# Altium PCB Flex_Bridge_SW.PcbDoc (part 1 of 2)
Units mm, origin at the board's own origin, x right, y up, seen from the top; angles counter-clockwise.
Board outline 84.91 x 39.78 mm, 2 copper layers (Top Layer, Bottom Layer); 3 components, 13 nets, 66 pads, 52 vias.
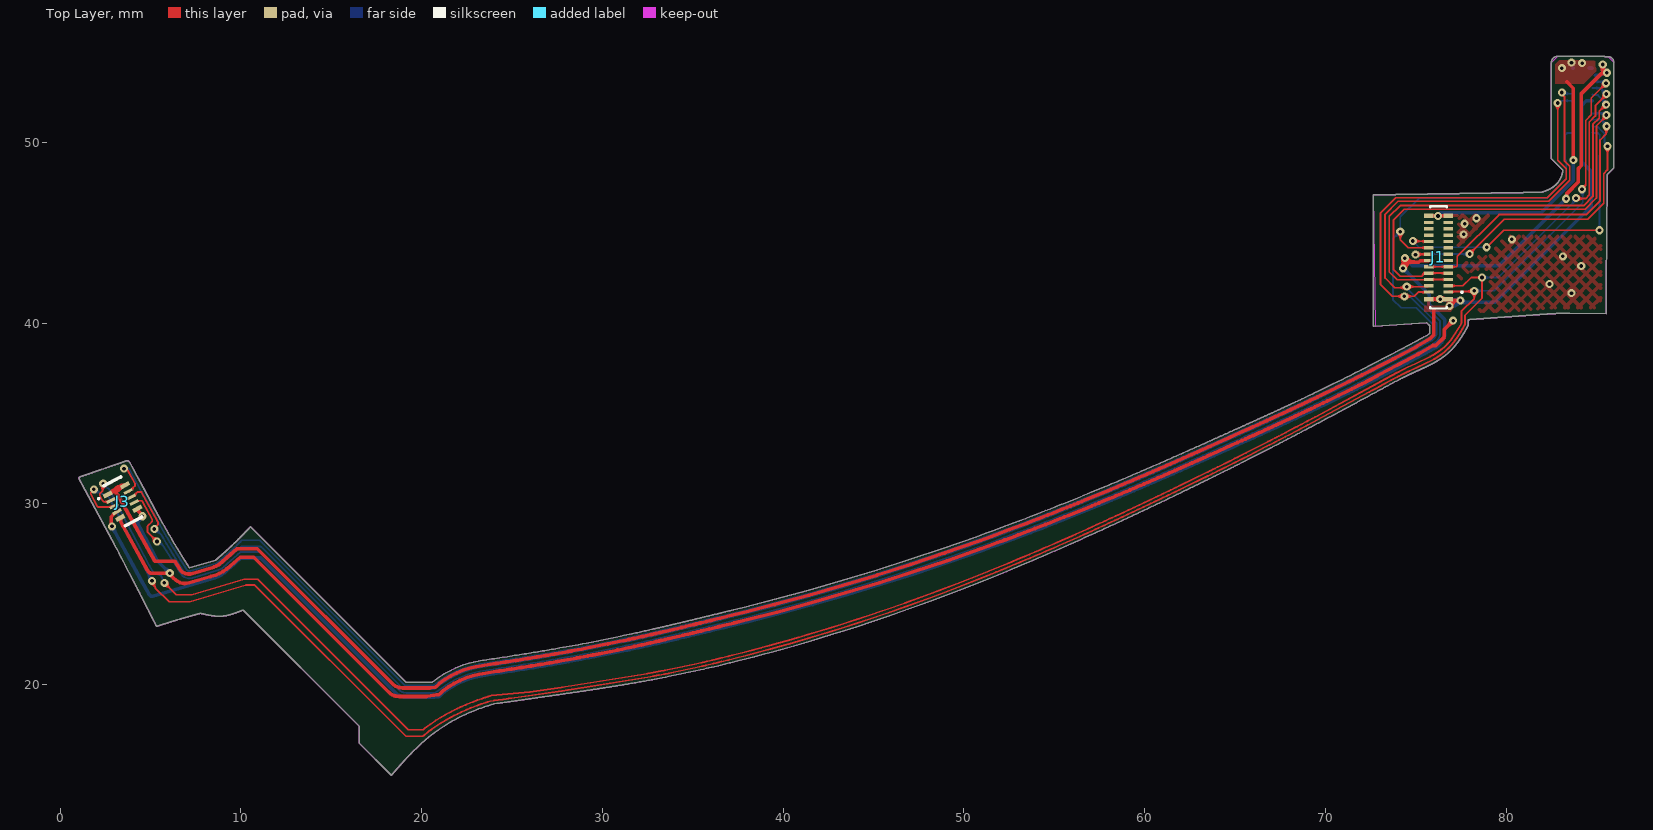
[diagram p0: Top Layer view]
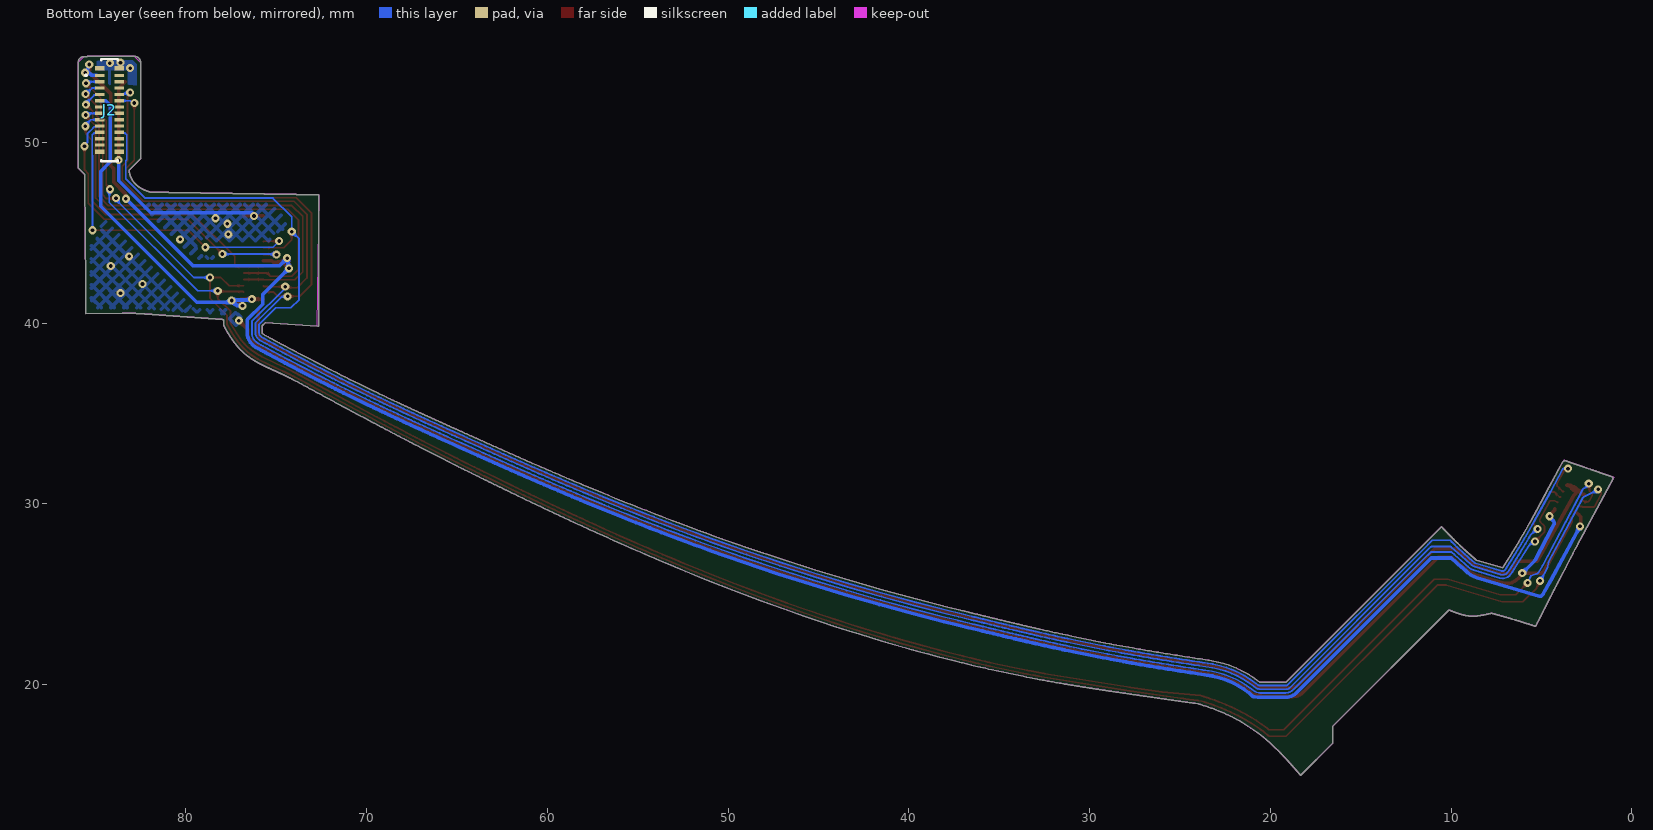
[diagram p1: Bottom Layer view, seen from below]

## Layer stack, top to bottom
Top Solder: solder mask 0.0102, Solder Resist, Dk 3.5
Top Layer: signal copper 0.0356
Dielectric 1: dielectric 0.32, FR-4, Dk 4.8
Bottom Layer: signal copper 0.0356
Bottom Solder: solder mask 0.0102, Solder Resist, Dk 3.5

## Board outline
5565 vertices, not listed, extent 1.045,14.979 85.954,54.763

## Design rules (kind name [scope] priority, off if disabled: settings)
Clearance SB [InNet('GND')] p1: gap=0.1 ignorepadtopadclearanceinfootprint=FALSE except(0.2: Arc-Arc Arc-Track Arc-Fill Arc-Poly Arc-Region Track-Track Track-Fill Track-Poly Track-Region SMDPad-Fill SMDPad-Poly SMDPad-Region THPad-Fill THPad-Poly THPad-Region Via-Fill Via-Poly Via-Region Fill-Fill Fill-Poly Fill-Region Poly-Poly Poly-Region Region-Region)
Clearance [All] p2: gap=0.1 ignorepadtopadclearanceinfootprint=FALSE
ComponentClearance [All] p1 off: gap=0.254 collisioncheckmode=3 verticalgap=0.254 showdistances=FALSE
DiffPairsRouting [All] p1: maxlimit=10 minlimit=0.125 mostfreqgap=0.15 toplayer_minwidth=0.156 toplayer_maxwidth=0.381 toplayer_prefwidth=0.381 bottomlayer_minwidth=0.156 bottomlayer_maxwidth=0.381 bottomlayer_prefwidth=0.381 maxuncoupledlength=12.7
FabricationTestPointUsage FabricationTestPointUsage_1 [All] p1: valid=0 allowmultiple=FALSE
FabricationTestpoint FabricationTestpoint_1 [All] p1: side=3 testpointundercomponent=TRUE minsize=1.016 maxsize=2.54 preferedsize=1.524 minholesize=0 maxholesize=1.016 preferedholesize=0.813 testpointgrid=0.025 allowsidetop=TRUE allowsidebottom=TRUE usegrid=TRUE gridtolerance=0
HoleSize [All] p1: absolutevalues=TRUE maxlimit=6 minlimit=0.2 maxpercent=80.000 minpercent=20.000
HoleSize FabricationTestpoint [All] p2 off: absolutevalues=TRUE maxlimit=2.54 minlimit=0.025 maxpercent=80.000 minpercent=20.000
HoleSize FabricationTestPointUsage [All] p3 off: absolutevalues=TRUE maxlimit=2.54 minlimit=0.025 maxpercent=80.000 minpercent=20.000
MinimumSolderMaskSliver [All] p1 off: minsoldermaskwidth=0.07
MinimumSolderMaskSliver SilkscreenOverComponentPads [All] p2: minsoldermaskwidth=0.1
PlaneClearance [All] p1: clearance=0.5
PlaneConnect [All] p1: planeconnectstyle=Relief reliefexpansion=0.4 reliefentries=4 reliefconductorwidth=0.15 reliefairgap=0.15
PolygonConnect [All] p1: connectstyle=Direct reliefconductorwidth=0.15 reliefentries=4 polygonreliefangle="90 Angle" airgapwidth=0.254
RoutingCorners [All] p1: cornerstyle=45-Degree minsetback=1.25 maxsetback=1.25
RoutingVias [All] p1: holewidth=0.3 width=0.6 viastyle="Through Hole" minholewidth=0.2 minwidth=0.45 maxholewidth=0.45 maxwidth=0.75
SilkToSilkClearance [All] p1 off: silktosilkclearance=0.254
SilkToSolderMaskClearance [IsPad] p1 off: minsilkscreentomaskgap=0.254 clearancetoexposedcopper=TRUE
SolderMaskExpansion Via [IsVia] p1: expansion=-0.61 istentingtop=FALSE
SolderMaskExpansion [All] p2: expansion=0.03 istentingtop=FALSE
SupplyNets "Schematic Supply Nets_1" [InNet('1V8')] p1: voltage=0.000
SupplyNets "Schematic Supply Nets" [InNet('GND')] p2: voltage=0.000
Width [All] p1: maxlimit=10 minlimit=0.1 preferedwidth=0.15
19 further rules are at their usual default settings.

## Components (designator, comment, footprint, x,y, rotation, side; value= is the part's Value field where it differs from the comment)
J1 "BM29B-24DP_2-0.35V_51" "New footprint 1" 76.251,43.637 r90 top
J2 "BM29B-24DP_2-0.35V_51" "New footprint 1" 84.22,51.777 r270 bottom
J3 "BM29B-6DP/2-0.35V(53)" BM29B-6DP_2-0.35V(53)-Footprint-1 3.454,30.124 r298 top

## Footprints (in the part's own frame and the unit in brackets; to place one, negate y for a bottom-side part, rotate by r counter-clockwise, add the part's x,y. Pads: shape width x height; smd on the part's side, far side on the other; paste and mask are expansions set on the pad)
BM29B-6DP_2-0.35V(53)-Footprint-1 [mm]
  rect 0.25x0.53 smd: 1(-0.735,-0.54) 2(-0.735,0.54) 9(0.735,-0.54) 10(0.735,0.54)
  rect 0.18x0.53 smd: 3(-0.35,-0.54) 4(-0.35,0.54) 5(0,-0.54) 6(0,0.54) 7(0.35,-0.54) 8(0.35,0.54)
  silkscreen extent -1.25,-1.14 1.26,0.54, body extent -1.25,-0.79 1.25,0.79, height 0.51
"New footprint 1" [mm]
  rect 0.18x0.53 smd paste-1 mask+0.05: 1(-1.925,-0.54) 2(-1.925,0.54) 3(-1.575,-0.54) 4(-1.575,0.54) 5(-1.225,-0.54) 6(-1.225,0.54) 7(-0.875,-0.54) 8(-0.875,0.54) 9(-0.525,-0.54) 10(-0.525,0.54) 11(-0.175,-0.54) 12(-0.175,0.54) 13(0.175,-0.54) 14(0.175,0.54) 15(0.525,-0.54) 16(0.525,0.54) 17(0.875,-0.54) 18(0.875,0.54) 19(1.225,-0.54) 20(1.225,0.54) 21(1.575,-0.54) 22(1.575,0.54) 23(1.925,-0.54) 24(1.925,0.54)
  rect 0.25x0.53 smd paste-1 mask+0.05: P1_1(-2.31,-0.54) P1_2(-2.31,0.54) P2_1(2.31,-0.54) P2_2(2.31,0.54)
  silkscreen extent -2.83,-1.36 2.83,0.46, body extent -2.83,-0.69 2.83,0.71, height 0.4

## Part data
J1 J2: library part CMP-00140-3, "Ultra-small, power/signal contact design for Board-to-Board/FPC-to-Board providing 3A max current"
J3: library part CMP-002-00078-6, "Ultra-Small, Power & Signal Hybrid, Board to Board / FPC to Board with 3A Max."

## Via types
v1: diameter 0.45, hole 0.2, Top Layer to Bottom Layer, 52 vias

## Nets (pads, with @x,y where several pads share a name; then routed paths per layer and width w, separated by ;. In a path a pad name is that pad's centre, name@x,y a point inside that pad or via, vN(x,y) a via of type N, cw(c..) or ccw(c..) an arc to the next point about the centre after c; other vN are vias at no path point)
1V8: J1.P1_1 J1.P1_2 J2.9 J3.1 J3.2 | length 105.9
  Top Layer w0.2: J3.1@2.633,30.52 2.712,30.52 2.937,30.744 cw(c3.713,29.968) J3.2@3.545,31.053 ; 2.937,30.665 3.016,30.665 ; 3.021,30.66 3.073,30.608 ; J3.2@3.586,31.027 3.431,30.966 3.073,30.608 ; 8.489,26.503 7.272,26.139 cw(c7.107,26.694) 6.641,26.35 cw(c7.107,26.694) 6.639,26.353 6.619,26.384 6.342,26.828 5.231,26.828 3.274,30.363 3.26,30.387 3.222,30.46 3.12,30.561 3.073,30.608 ; 8.49,26.503 ccw(c8.156,27.617) 9.039,26.86 9.099,26.913 ccw(c8.803,27.252) 9.101,26.914 9.169,26.974 ; 9.169,26.974 ccw(c8.872,27.312) 9.17,26.975 9.202,27.003 ccw(c8.658,27.624) 9.203,27.004 9.788,27.519 10.905,27.519 18.369,20.054 ccw(c18.955,20.635) 18.648,19.869 ccw(c18.955,20.635) 18.955,19.81 20.374,19.81 ccw(c20.377,20.635) 20.5,19.819 20.752,19.859 20.795,19.876 20.911,19.991 20.975,20.056 20.981,20.061 cw(c24.021,16.121) 22.996,20.991 cw(c23.037,20.795) 23.006,20.992 23.81,21.12 23.955,21.142 24.097,21.163 ; 24.098,21.163 24.239,21.185 24.38,21.206 ; 24.382,21.207 24.521,21.228 24.659,21.249 ccw(c24.622,21.496) 24.661,21.249 24.797,21.27 24.935,21.292 25.07,21.313 25.204,21.334 25.339,21.356 25.472,21.377 25.603,21.398 ; 25.604,21.398 25.735,21.419 25.865,21.44 25.993,21.461 26.122,21.482 ; 26.123,21.483 26.249,21.503 ; 26.249,21.504 ccw(c26.209,21.75) 26.25,21.504 26.377,21.525 26.501,21.546 ; 26.503,21.546 26.626,21.567 26.75,21.588 ; 26.751,21.588 26.872,21.608 ccw(c26.831,21.855) 26.874,21.609 26.995,21.629 27.116,21.65 ; 27.116,21.65 ccw(c27.074,21.897) 27.118,21.651 27.236,21.671 ccw(c27.195,21.918) 27.238,21.671 27.357,21.692 ccw(c27.315,21.939) 27.358,21.692 27.478,21.713 27.594,21.734 ; 27.595,21.734 27.77,21.765 27.944,21.797 28.117,21.828 ccw(c28.074,22.074) 28.119,21.828 28.289,21.859 ; 28.289,21.859 ccw(c28.245,22.105) 28.29,21.86 28.461,21.891 28.628,21.922 28.85,21.964 29.07,22.006 ccw(c29.025,22.252) 29.072,22.006 29.342,22.058 ccw(c29.22,22.697) 29.347,22.059 30.294,22.247 ccw(c30.133,23.056) 30.3,22.248 30.709,22.333 ccw(c30.618,22.773) 30.71,22.333 30.965,22.386 31.167,22.429 ; 31.169,22.429 31.319,22.462 31.47,22.494 ; 31.471,22.494 31.621,22.527 31.72,22.548 31.82,22.57 ; 31.821,22.57 31.919,22.592 32.019,22.614 32.118,22.636 32.216,22.657 32.316,22.68 32.413,22.701 ccw(c32.315,23.141) 32.416,22.702 32.512,22.724 ; 32.513,22.724 32.61,22.746 ; 32.611,22.746 32.713,22.769 32.807,22.79 ; 32.808,22.791 32.856,22.802 ccw(c32.756,23.24) 32.858,22.802 32.905,22.813 ccw(c32.85,23.057) 32.907,22.813 32.954,22.824 ; 32.955,22.824 33.003,22.835 ccw(c32.903,23.274) 33.005,22.836 33.107,22.859 33.198,22.88 33.293,22.902 33.347,22.914 33.395,22.926 ; 33.396,22.926 33.493,22.948 ; 33.494,22.949 33.542,22.96 33.641,22.983 33.738,23.006 ; 33.739,23.006 33.878,23.038 33.983,23.063 ccw(c33.881,23.502) 33.985,23.064 34.131,23.098 34.328,23.145 ccw(c34.271,23.388) 34.329,23.145 34.378,23.157 ccw(c34.321,23.4) 34.379,23.157 34.428,23.169 ; 34.429,23.169 34.576,23.204 ; 34.577,23.204 34.627,23.216 34.873,23.275 ccw(c34.828,23.47) 34.874,23.276 35.074,23.324 ; 35.075,23.324 35.124,23.336 ; 35.125,23.336 35.175,23.348 35.325,23.384 35.424,23.408 ccw(c35.368,23.652) 35.427,23.409 35.477,23.421 35.731,23.482 ; 35.732,23.483 35.783,23.495 ; 35.784,23.495 35.988,23.545 36.246,23.608 ccw(c36.14,24.045) 36.247,23.608 36.351,23.633 36.508,23.672 ccw(c36.401,24.109) 36.509,23.672 36.613,23.697 37.146,23.827 ccw(c36.992,24.459) 37.149,23.828 37.85,24.001 ccw(c37.653,24.802) 37.857,24.003 39.531,24.433 ccw(c39.371,25.063) 39.536,24.434 ccw(c4.873,155.811) 50.793,27.933 51.27,28.105 51.695,28.26 ; 51.696,28.261 52.12,28.417 ; 52.121,28.417 52.49,28.555 ; 52.491,28.555 52.86,28.694 ; 52.861,28.694 53.176,28.814 53.493,28.935 53.808,29.055 ; 53.809,29.056 54.122,29.177 ; 54.123,29.177 54.384,29.278 54.644,29.38 ccw(c54.408,29.986) 54.647,29.381 54.906,29.483 ccw(c54.815,29.716) 54.908,29.484 55.166,29.586 ccw(c55.002,30.005) 55.169,29.587 55.43,29.691 55.688,29.794 ; 55.689,29.794 55.897,29.878 56.104,29.961 56.312,30.045 ccw(c56.218,30.277) 56.314,30.046 56.52,30.13 ccw(c56.35,30.547) 56.521,30.13 56.727,30.214 ccw(c56.634,30.446) 56.728,30.215 56.937,30.3 57.142,30.385 57.349,30.47 57.557,30.556 57.765,30.642 ; 57.766,30.642 57.971,30.728 ccw(c57.876,30.959) 57.973,30.729 58.127,30.793 ccw(c57.877,31.393) 58.129,30.794 ; 58.129,30.794 58.283,30.859 58.436,30.923 ccw(c58.187,31.523) 58.44,30.925 58.595,30.99 58.748,31.054 ccw(c58.652,31.285) 58.75,31.055 58.905,31.121 59.062,31.187 59.215,31.253 59.369,31.318 ccw(c59.273,31.549) 59.371,31.319 59.526,31.385 59.68,31.452 ccw(c59.504,31.866) 59.683,31.453 59.836,31.518 ccw(c59.739,31.749) 59.838,31.519 59.991,31.585 ccw(c59.736,32.183) 59.993,31.586 60.147,31.652 ccw(c59.971,32.066) 60.149,31.653 60.304,31.72 ; 60.304,31.72 60.458,31.787 60.615,31.855 60.769,31.922 ccw(c60.511,32.519) 60.772,31.923 60.926,31.991 ccw(c60.747,32.403) 60.928,31.991 61.081,32.058 61.237,32.127 ccw(c61.139,32.356) 61.239,32.128 61.394,32.195 ; 61.394,32.195 ccw(c61.295,32.425) 61.396,32.196 61.55,32.264 61.654,32.31 ; 61.655,32.31 61.758,32.356 61.862,32.402 ccw(c61.762,32.631) 61.863,32.402 61.967,32.448 ; 61.967,32.448 62.07,32.493 ccw(c61.889,32.905) 62.073,32.495 62.176,32.54 62.28,32.586 ; 62.28,32.587 62.384,32.633 ccw(c62.201,33.044) 62.386,32.633 62.488,32.679 ; 62.489,32.679 62.593,32.726 ; 62.594,32.726 62.696,32.772 ccw(c62.596,33.001) 62.698,32.772 62.802,32.819 ; 62.802,32.819 62.905,32.865 ; 62.907,32.866 63.01,32.912 ccw(c62.674,33.665) 63.012,32.913 63.116,32.959 ccw(c62.933,33.37) 63.117,32.96 63.22,33.006 ccw(c63.119,33.234) 63.221,33.006 63.324,33.053 ccw(c62.988,33.806) 63.327,33.054 63.432,33.101 63.534,33.147 ccw(c63.433,33.376) 63.536,33.148 63.639,33.194 ccw(c63.538,33.422) 63.64,33.195 64.664,33.656 ; 64.665,33.656 65.01,33.812 ; 65.011,33.812 65.256,33.922 65.448,34.009 ccw(c65.263,34.42) 65.45,34.01 ; 65.45,34.01 65.641,34.096 ; 65.642,34.097 65.83,34.182 ccw(c65.728,34.41) 65.831,34.183 65.879,34.204 ; 65.879,34.204 65.926,34.225 ; 65.927,34.226 65.975,34.248 66.196,34.348 66.276,34.384 66.404,34.442 66.564,34.515 66.674,34.565 ccw(c66.488,34.975) 66.676,34.566 66.721,34.587 ; 66.721,34.587 66.766,34.607 ccw(c66.497,35.199) 66.769,34.608 66.951,34.691 67.042,34.733 ccw(c66.856,35.143) 67.045,34.735 67.148,34.782 67.272,34.839 ; 67.273,34.839 67.364,34.881 ccw(c67.26,35.108) 67.366,34.882 67.446,34.919 67.592,34.986 67.71,35.041 67.776,35.071 67.924,35.14 68.027,35.187 68.093,35.218 ccw(c67.99,35.446) 68.095,35.219 68.14,35.24 ccw(c67.95,35.648) 68.141,35.241 68.185,35.261 ; 68.186,35.262 68.23,35.282 ; 68.231,35.283 68.324,35.326 68.411,35.367 ccw(c68.308,35.595) 68.414,35.368 68.503,35.41 ccw(c68.313,35.818) 68.505,35.411 68.594,35.453 ccw(c68.49,35.68) 68.596,35.454 68.686,35.496 68.777,35.539 ccw(c68.586,35.946) 68.779,35.54 68.869,35.582 68.961,35.626 69.053,35.669 69.142,35.712 ccw(c68.791,36.458) 69.146,35.714 69.283,35.779 69.419,35.844 ccw(c69.314,36.07) 69.422,35.845 69.559,35.911 ccw(c69.279,36.497) 69.561,35.912 69.745,36 ccw(c69.55,36.406) 69.747,36.001 69.978,36.113 ccw(c69.696,36.698) 69.981,36.114 70.593,36.412 ccw(c70.232,37.154) 70.598,36.415 71.078,36.652 ; 71.079,36.652 71.323,36.773 ccw(c71.035,37.356) 71.326,36.775 71.521,36.873 ccw(c71.154,37.611) 71.524,36.874 71.726,36.976 71.874,37.05 ; 71.875,37.051 72.027,37.128 72.181,37.206 ; 72.182,37.206 72.342,37.287 72.441,37.338 ; 72.442,37.338 72.547,37.392 72.65,37.445 ccw(c72.538,37.668) 72.652,37.446 72.759,37.501 72.863,37.554 ccw(c72.658,37.955) 72.864,37.555 72.97,37.61 ccw(c72.858,37.833) 72.972,37.611 73.079,37.666 ; 73.08,37.666 73.188,37.722 ccw(c72.981,38.122) 73.189,37.723 73.298,37.78 73.407,37.836 ; 73.408,37.836 73.519,37.894 73.629,37.952 73.74,38.01 ccw(c73.533,38.409) 73.743,38.011 73.854,38.069 74.943,38.641 74.946,38.642 ccw(c72.145,43.639) 75.048,38.702 75.799,39.142 75.997,39.34 75.997,40.714 ; J1.P1_2@75.712,41.327 v1(76.345,41.326) ; v1@76.346,41.327 76.79,41.327 76.931,41.327 77.008,41.25 77.167,41.25 ; v1(76.866,40.948) 77.167,41.25 ; v1(77.47,41.25) 77.167,41.25
  Bottom Layer w0.2: v1(76.345,41.326) 76.393,41.278 v1@77.442,41.278 ; v1(76.866,40.948) 76.888,40.97 77.191,40.97 v1@77.42,41.2 ; v1(77.47,41.25) v1@77.518,41.202 ; v1@77.573,41.144 79.396,41.144 84.709,46.457 84.709,48.387 84.176,48.92 84.176,52.041 84.437,52.302 J2.9@84.76,52.302
3V3: J1.12 J2.1 J3.7 | length 113.4
  Top Layer w0.2: v1@2.819,28.804 2.819,29.239 2.83,29.291 2.91,29.37 ; 2.91,29.371 J3.7@3.141,29.561 ; v1(74.295,43.028) 74.312,43.045 v1@74.312,43.112 ; v1@74.295,43.095 v1@74.312,43.112 ; v1@74.379,43.111 74.632,43.365 ; J1.12@75.701,43.452 75.244,43.452 75.157,43.365 74.691,43.365 ; v1(83.314,46.876) 83.362,46.924 83.362,47.173 83.992,47.803 83.997,47.803 83.997,48.556 84.149,48.709 84.149,49.044 84.144,49.049 84.144,51.303 84.144,52.672 85.275,53.803 85.527,53.803 v1(85.573,53.848) ; 85.344,53.871 v1(85.344,54.305) ; v1@74.312,43.112 74.345,43.145 74.345,43.346 ; v1@74.312,43.112 74.312,43.447 v1@74.345,43.48 ; 74.345,43.346 v1@74.345,43.48 ; 74.345,43.346 74.363,43.365 74.632,43.365 ; v1@74.345,43.48 74.345,43.547 v1(74.393,43.595) 74.461,43.595 74.691,43.365 ; 74.632,43.365 74.691,43.365
  Bottom Layer w0.2: v1(2.87,28.753) 4.484,25.749 4.912,25.002 5.029,24.885 5.132,24.882 8.575,25.912 ccw(c8.173,27.253) 9.236,26.342 9.296,26.395 ccw(c9,26.734) 9.298,26.396 9.365,26.455 ; 9.366,26.455 ccw(c9.069,26.794) 9.367,26.457 9.399,26.484 ccw(c8.855,27.105) 9.4,26.486 9.985,27 11.101,27 18.566,19.536 ccw(c19.152,20.117) 18.845,19.351 ccw(c19.152,20.117) 19.152,19.292 20.571,19.292 ccw(c20.574,20.117) 20.697,19.301 20.949,19.34 20.992,19.358 21.107,19.473 21.172,19.537 21.178,19.543 cw(c24.218,15.603) 23.193,20.472 cw(c23.234,20.277) 23.203,20.474 24.006,20.602 24.152,20.624 24.294,20.645 ; 24.295,20.645 24.436,20.667 24.577,20.688 ; 24.579,20.688 24.718,20.71 24.856,20.731 ccw(c24.819,20.978) 24.858,20.731 24.994,20.752 25.132,20.774 25.266,20.795 25.401,20.816 25.536,20.837 25.669,20.859 25.8,20.88 ; 25.801,20.88 25.931,20.901 26.062,20.922 26.19,20.943 26.318,20.964 ; 26.32,20.964 26.446,20.985 ; 26.446,20.985 ccw(c26.406,21.232) 26.447,20.985 26.574,21.006 26.698,21.027 ; 26.699,21.027 26.823,21.048 26.947,21.069 ; 26.948,21.069 27.069,21.09 ccw(c27.028,21.337) 27.07,21.09 27.192,21.111 27.313,21.132 ccw(c27.27,21.378) 27.315,21.132 27.433,21.153 ccw(c27.392,21.399) 27.435,21.153 27.554,21.174 ccw(c27.512,21.42) 27.555,21.174 27.675,21.195 27.791,21.216 ; 27.792,21.216 27.967,21.247 28.141,21.278 28.314,21.31 ccw(c28.271,21.556) 28.316,21.31 28.485,21.341 ; 28.486,21.341 ccw(c28.442,21.587) 28.487,21.341 28.658,21.373 28.825,21.404 29.047,21.446 29.267,21.487 ccw(c29.222,21.733) 29.269,21.488 29.539,21.54 ccw(c29.417,22.178) 29.544,21.541 30.491,21.729 ccw(c30.33,22.538) 30.497,21.73 30.906,21.814 ccw(c30.815,22.255) 30.907,21.815 31.161,21.868 31.364,21.911 ; 31.365,21.911 31.516,21.943 31.667,21.976 ; 31.668,21.976 31.818,22.008 31.917,22.03 32.017,22.052 ; 32.017,22.052 32.116,22.073 32.215,22.095 32.315,22.117 32.413,22.139 32.513,22.161 32.61,22.183 ccw(c32.512,22.622) 32.613,22.184 32.709,22.205 ; 32.71,22.205 32.807,22.227 ; 32.808,22.228 32.91,22.251 33.004,22.272 ; 33.004,22.272 33.053,22.283 ccw(c32.953,22.722) 33.054,22.284 33.102,22.294 ccw(c33.047,22.538) 33.103,22.295 33.151,22.306 ; 33.152,22.306 33.2,22.317 ccw(c33.1,22.756) 33.202,22.317 33.304,22.341 33.395,22.362 33.49,22.384 33.544,22.396 33.592,22.407 ; 33.593,22.408 33.69,22.43 ; 33.691,22.43 33.739,22.442 33.838,22.465 33.935,22.487 ; 33.936,22.488 34.075,22.52 34.18,22.545 ccw(c34.078,22.983) 34.182,22.545 34.328,22.58 34.525,22.627 ccw(c34.468,22.87) 34.526,22.627 34.574,22.638 ccw(c34.518,22.882) 34.576,22.639 34.625,22.65 ; 34.625,22.651 34.773,22.686 ; 34.774,22.686 34.823,22.698 35.07,22.757 ccw(c35.024,22.952) 35.071,22.757 35.271,22.805 ; 35.271,22.805 35.321,22.817 35.372,22.83 35.522,22.866 35.621,22.89 ; 35.621,22.89 ccw(c35.564,23.133) 35.624,22.89 35.674,22.903 35.928,22.964 ; 35.929,22.964 35.979,22.977 ; 35.98,22.977 36.185,23.027 36.442,23.089 ccw(c36.337,23.527) 36.444,23.09 36.548,23.115 36.705,23.153 ccw(c36.598,23.59) 36.706,23.154 36.81,23.179 37.343,23.309 ccw(c37.189,23.941) 37.346,23.31 38.047,23.483 ccw(c37.85,24.284) 38.054,23.484 39.728,23.914 ccw(c39.568,24.544) 39.733,23.916 ccw(c5.07,155.292) 50.99,27.414 51.467,27.587 51.892,27.742 52.316,27.899 ; 52.318,27.899 52.687,28.037 ; 52.688,28.037 53.057,28.176 ; 53.058,28.176 53.373,28.295 53.69,28.416 54.005,28.537 ; 54.006,28.537 54.319,28.659 ; 54.32,28.659 54.581,28.76 54.841,28.862 ccw(c54.605,29.468) 54.844,28.863 55.103,28.965 ccw(c55.011,29.198) 55.104,28.966 55.363,29.068 ccw(c55.199,29.487) 55.365,29.069 55.627,29.173 55.885,29.276 ; 55.886,29.276 56.094,29.36 56.301,29.443 56.509,29.527 ccw(c56.415,29.759) 56.51,29.528 56.716,29.611 ccw(c56.547,30.028) 56.718,29.612 56.924,29.696 ccw(c56.831,29.928) 56.925,29.697 57.133,29.782 57.339,29.866 57.546,29.952 57.754,30.038 57.961,30.124 ; 57.962,30.124 58.168,30.21 ccw(c58.073,30.441) 58.17,30.21 58.324,30.275 ccw(c58.074,30.875) 58.325,30.276 ; 58.326,30.276 58.48,30.34 58.633,30.405 ccw(c58.383,31.005) 58.637,30.406 58.792,30.472 58.945,30.536 ccw(c58.849,30.767) 58.946,30.537 59.102,30.603 59.259,30.669 59.412,30.734 59.566,30.8 ccw(c59.47,31.031) 59.568,30.801 59.722,30.867 59.877,30.933 ccw(c59.701,31.347) 59.88,30.934 60.033,31 ccw(c59.936,31.23) 60.034,31.001 60.188,31.067 ccw(c59.933,31.665) 60.19,31.068 60.344,31.134 ccw(c60.167,31.548) 60.346,31.135 60.5,31.202 ; 60.501,31.202 60.655,31.269 60.812,31.337 60.966,31.404 ccw(c60.708,32.001) 60.969,31.405 61.123,31.472 ccw(c60.944,31.885) 61.125,31.473 61.278,31.54 61.434,31.608 ccw(c61.336,31.838) 61.436,31.609 61.59,31.677 ; 61.591,31.677 ccw(c61.492,31.907) 61.592,31.678 61.747,31.746 61.851,31.791 ; 61.852,31.792 61.955,31.837 62.059,31.883 ccw(c61.959,32.112) 62.06,31.884 62.164,31.929 62.267,31.975 ccw(c62.086,32.387) 62.269,31.976 62.373,32.022 62.476,32.068 ; 62.477,32.068 62.581,32.114 ccw(c62.398,32.526) 62.582,32.115 62.685,32.161 ; 62.686,32.161 62.79,32.207 62.893,32.253 ccw(c62.793,32.482) 62.894,32.254 62.999,32.3 ; 62.999,32.301 63.102,32.347 ; 63.104,32.347 63.207,32.394 ccw(c62.871,33.147) 63.209,32.394 63.313,32.441 ccw(c63.129,32.852) 63.314,32.441 63.417,32.487 ccw(c63.316,32.716) 63.418,32.488 63.521,32.534 ccw(c63.184,33.287) 63.523,32.535 63.629,32.583 63.731,32.628 ccw(c63.63,32.857) 63.733,32.629 63.835,32.676 ccw(c63.734,32.904) 63.837,32.676 64.86,33.137 ; 64.861,33.138 65.207,33.293 ; 65.208,33.294 65.453,33.404 65.645,33.491 ccw(c65.46,33.901) 65.647,33.492 ; 65.647,33.492 65.838,33.578 ; 65.839,33.578 66.027,33.663 ccw(c65.925,33.892) 66.028,33.664 66.076,33.686 ; 66.076,33.686 66.123,33.707 ; 66.124,33.707 66.172,33.729 66.393,33.83 66.473,33.866 66.601,33.924 66.761,33.997 66.871,34.047 ccw(c66.685,34.457) 66.873,34.048 66.918,34.068 ; 66.918,34.068 66.963,34.089 ccw(c66.694,34.681) 66.966,34.09 67.148,34.173 67.239,34.215 ccw(c67.053,34.625) 67.242,34.216 67.345,34.264 67.469,34.321 ; 67.47,34.321 67.561,34.363 ccw(c67.457,34.59) 67.563,34.364 67.643,34.401 67.789,34.468 67.907,34.522 67.973,34.553 68.121,34.621 68.223,34.669 68.29,34.7 ccw(c68.186,34.928) 68.292,34.701 68.337,34.722 ccw(c68.147,35.13) 68.338,34.722 68.382,34.743 ; 68.383,34.743 68.427,34.764 ; 68.428,34.764 68.521,34.808 68.608,34.849 ccw(c68.505,35.076) 68.611,34.85 68.7,34.892 ccw(c68.51,35.3) 68.702,34.893 68.791,34.934 ccw(c68.687,35.162) 68.793,34.935 68.883,34.978 68.974,35.021 ccw(c68.783,35.428) 68.976,35.022 69.066,35.064 ; 69.067,35.064 69.158,35.108 69.25,35.151 69.339,35.193 ccw(c68.987,35.94) 69.343,35.195 69.48,35.26 69.616,35.326 ccw(c69.511,35.552) 69.619,35.327 69.756,35.392 ccw(c69.476,35.979) 69.758,35.393 69.942,35.482 ccw(c69.747,35.888) 69.944,35.483 70.175,35.594 ccw(c69.893,36.18) 70.178,35.596 70.789,35.894 ccw(c70.429,36.636) 70.795,35.896 71.275,36.133 ; 71.276,36.134 71.52,36.255 ccw(c71.232,36.838) 71.523,36.257 71.718,36.354 ccw(c71.351,37.093) 71.721,36.356 71.923,36.457 72.071,36.532 ; 72.072,36.532 72.224,36.609 72.378,36.688 ; 72.379,36.688 72.539,36.769 72.638,36.82 ; 72.639,36.82 72.744,36.874 72.847,36.927 ccw(c72.735,37.15) 72.849,36.928 72.956,36.983 73.059,37.036 ccw(c72.854,37.437) 73.061,37.037 73.167,37.091 ccw(c73.054,37.315) 73.169,37.093 73.276,37.148 73.385,37.204 ccw(c73.178,37.604) 73.386,37.205 73.495,37.261 73.603,37.318 ; 73.604,37.318 73.716,37.376 73.826,37.434 73.937,37.492 ccw(c73.73,37.891) 73.939,37.493 74.051,37.551 74.164,37.61 74.275,37.669 74.394,37.731 ccw(c74.091,38.307) 74.396,37.733 74.511,37.794 74.626,37.854 74.745,37.918 74.863,37.98 ccw(c74.747,38.202) 74.865,37.981 74.982,38.043 ccw(c74.866,38.265) 74.983,38.044 75.103,38.108 ccw(c74.987,38.329) 75.104,38.108 75.224,38.172 ; 75.225,38.172 75.345,38.237 ccw(c75.229,38.458) 75.347,38.238 75.468,38.303 ccw(c75.257,38.7) 75.47,38.304 75.593,38.369 75.718,38.437 75.847,38.506 75.97,38.573 76.098,38.641 ccw(c75.706,39.367) 76.185,38.696 ccw(c75.706,39.367) 76.291,38.786 76.352,38.846 ccw(c75.77,39.431) 76.562,39.202 76.585,39.279 ccw(c76.345,39.349) 76.595,39.349 76.595,40.193 75.743,41.045 75.743,41.58 v1(74.295,43.028) 74.343,43.075 74.343,43.477 74.393,43.527 v1(74.393,43.595) 74.808,43.18 79.618,43.18 v1(83.314,46.876) ; J2.1@84.925,53.702 85.192,53.702 85.419,53.928 v1@85.419,54.002 ; v1(85.344,54.305) 85.392,54.257 85.392,54.09 85.419,54.063 v1@85.419,54.002 ; v1@85.545,53.848 v1(85.573,53.848) v1@85.419,54.002
GND: J1.P2_1 J1.P2_2 J2.P1_1 J2.P1_2 J3.9 J3.10 | length 103.7
  Top Layer w0.2: J3.9@3.353,29.21 3.353,29.032 3.36,29.011 3.476,28.774 4.824,26.339 ccw(c5.514,26.722) 4.889,26.241 ccw(c5.046,26.364) 4.958,26.185 4.999,26.164 5.046,26.164 v1(6.065,26.164) ; J3.10@4.276,29.729 4.276,29.65 4.547,29.379 v1(4.547,29.312) ; v1@6.076,26.149 6.183,25.977 6.199,25.961 6.258,25.903 6.393,25.785 ccw(c6.915,26.386) 7.145,25.624 8.329,25.978 8.369,25.988 ccw(c7.805,28.233) 9.382,26.539 9.401,26.557 9.959,27.047 10.713,27.047 18.177,19.583 ccw(c18.763,20.164) 18.456,19.398 ccw(c18.763,20.164) 18.763,19.339 20.182,19.339 ccw(c20.185,20.164) 20.308,19.348 ; 20.313,19.356 20.647,19.408 20.686,19.408 ; 20.687,19.407 20.813,19.427 20.939,19.447 20.982,19.464 21.097,19.579 21.162,19.644 21.168,19.649 cw(c24.208,15.709) 23.183,20.579 cw(c23.224,20.383) 23.192,20.58 23.996,20.708 24.141,20.73 24.284,20.751 ; 24.285,20.752 24.426,20.773 24.567,20.794 ; 24.568,20.795 24.708,20.816 24.846,20.837 ccw(c24.809,21.084) 24.847,20.837 24.983,20.859 25.121,20.88 25.256,20.901 25.391,20.922 25.526,20.944 25.659,20.965 25.79,20.986 ; 25.791,20.986 25.921,21.007 26.052,21.028 26.18,21.049 26.308,21.07 ; 26.309,21.071 26.436,21.092 ; 26.436,21.092 ccw(c26.396,21.338) 26.437,21.092 26.564,21.113 26.688,21.134 ; 26.689,21.134 26.813,21.155 26.936,21.176 ; 26.938,21.176 27.058,21.196 ccw(c27.018,21.443) 27.06,21.197 27.182,21.217 27.303,21.238 ccw(c27.26,21.485) 27.305,21.239 27.423,21.259 ccw(c27.381,21.506) 27.424,21.259 27.484,21.27 27.487,21.27 ; 27.485,21.27 27.487,21.27 ; 27.545,21.28 cw(c27.502,21.527) 27.544,21.28 27.487,21.27 ; 27.721,21.312 27.605,21.291 27.487,21.27 ; 27.723,21.312 27.897,21.343 28.072,21.374 28.244,21.406 ccw(c28.201,21.652) 28.246,21.406 28.416,21.437 ccw(c28.372,21.683) 28.417,21.437 28.589,21.469 28.755,21.5 28.977,21.542 29.198,21.583 ccw(c29.152,21.829) 29.199,21.584 29.469,21.636 ccw(c29.347,22.274) 29.474,21.637 30.421,21.825 ccw(c30.26,22.634) 30.427,21.826 30.836,21.91 ccw(c30.745,22.351) 30.838,21.911 31.092,21.964 31.295,22.007 ; 31.296,22.007 31.447,22.039 31.597,22.072 ; 31.598,22.072 31.748,22.104 31.847,22.126 ; 31.847,22.126 31.947,22.148 ; 31.948,22.148 32.047,22.169 32.146,22.191 32.246,22.213 32.344,22.235 32.443,22.257 32.54,22.279 ccw(c32.443,22.718) 32.543,22.28 32.639,22.301 ; 32.64,22.301 32.737,22.323 ; 32.738,22.324 32.841,22.347 32.934,22.368 ; 32.935,22.368 32.983,22.379 ccw(c32.884,22.818) 32.985,22.38 33.032,22.39 ccw(c32.977,22.634) 33.034,22.391 33.082,22.402 ; 33.083,22.402 33.131,22.413 ccw(c33.03,22.852) 33.132,22.413 33.234,22.437 33.325,22.458 33.42,22.48 33.474,22.492 ; 33.474,22.492 33.522,22.503 33.62,22.526 33.67,22.538 33.769,22.561 33.865,22.583 ; 33.867,22.584 34.005,22.616 34.111,22.641 ccw(c34.008,23.079) 34.112,22.641 34.258,22.676 34.455,22.723 ccw(c34.398,22.966) 34.456,22.723 34.505,22.734 ccw(c34.448,22.978) 34.506,22.735 34.555,22.746 ; 34.556,22.747 34.703,22.782 ; 34.704,22.782 34.754,22.794 35,22.853 ccw(c34.955,23.048) 35.002,22.853 35.201,22.901 ; 35.202,22.901 35.251,22.913 35.302,22.926 ; 35.303,22.926 35.452,22.962 35.551,22.986 ccw(c35.495,23.229) 35.554,22.986 35.604,22.999 35.858,23.06 35.91,23.073 ; 35.911,23.073 36.115,23.123 36.373,23.185 ccw(c36.267,23.623) 36.374,23.186 36.478,23.211 ; 36.479,23.211 36.635,23.249 ccw(c36.528,23.686) 36.636,23.25 36.74,23.275 ; 36.741,23.275 37.273,23.405 ccw(c37.12,24.037) 37.276,23.406 37.978,23.579 ccw(c37.78,24.38) 37.984,23.58 39.659,24.01 ccw(c39.498,24.64) 39.663,24.012 ccw(c5,155.388) 50.92,27.51 51.397,27.683 51.822,27.838 52.247,27.995 ; 52.248,27.995 52.617,28.133 ; 52.619,28.133 52.988,28.272 53.303,28.391 53.62,28.512 53.935,28.633 54.25,28.755 ; 54.251,28.755 54.511,28.856 54.771,28.958 ccw(c54.535,29.564) 54.774,28.959 55.033,29.061 ccw(c54.942,29.294) 55.035,29.062 ; 55.035,29.062 55.293,29.164 ccw(c55.129,29.583) 55.296,29.165 55.557,29.269 55.815,29.372 ; 55.816,29.372 56.024,29.456 56.231,29.539 56.439,29.623 ccw(c56.345,29.855) 56.441,29.624 56.647,29.707 ccw(c56.478,30.124) 56.648,29.708 56.854,29.792 ccw(c56.761,30.024) 56.856,29.793 57.064,29.878 57.27,29.962 57.476,30.048 57.684,30.134 ; 57.685,30.134 57.892,30.22 ; 57.893,30.22 58.099,30.306 ccw(c58.003,30.537) 58.1,30.306 58.254,30.371 ccw(c58.004,30.971) 58.256,30.372 58.41,30.436 58.563,30.501 ccw(c58.314,31.101) 58.567,30.502 58.722,30.568 58.875,30.632 ccw(c58.779,30.863) 58.877,30.633 59.032,30.699 59.189,30.765 59.342,30.83 59.496,30.896 ccw(c59.4,31.127) 59.498,30.897 59.653,30.963 59.807,31.029 ccw(c59.631,31.443) 59.81,31.03 59.963,31.096 ccw(c59.866,31.326) 59.965,31.097 60.119,31.163 ccw(c59.863,31.761) 60.12,31.164 60.274,31.23 ccw(c60.098,31.644) 60.276,31.231 60.431,31.298 ; 60.431,31.298 60.586,31.365 60.742,31.433 ; 60.742,31.433 60.896,31.5 ccw(c60.639,32.097) 60.899,31.501 61.053,31.568 ccw(c60.874,31.981) 61.055,31.569 61.209,31.636 61.365,31.704 ccw(c61.266,31.934) 61.366,31.705 61.521,31.773 ccw(c61.422,32.003) 61.523,31.774 61.677,31.842 61.781,31.887 ; 61.782,31.888 61.886,31.933 61.989,31.979 ccw(c61.89,32.208) 61.991,31.98 62.094,32.025 62.197,32.071 ccw(c62.016,32.483) 62.2,32.072 62.303,32.118 62.407,32.164 ; 62.407,32.164 62.511,32.21 ccw(c62.329,32.622) 62.513,32.211 62.615,32.257 ; 62.616,32.257 62.72,32.303 ; 62.721,32.304 62.823,32.349 ccw(c62.723,32.578) 62.825,32.35 62.929,32.396 ; 62.929,32.397 63.033,32.443 ; 63.034,32.443 63.137,32.49 ccw(c62.801,33.243) 63.139,32.49 63.243,32.537 ccw(c63.06,32.948) 63.244,32.537 63.347,32.583 ccw(c63.246,32.812) 63.348,32.584 63.452,32.63 ccw(c63.115,33.383) 63.454,32.631 63.56,32.679 63.661,32.724 ccw(c63.56,32.953) 63.663,32.725 63.766,32.772 ccw(c63.665,33) 63.767,32.772 64.791,33.233 ; 64.792,33.234 65.137,33.389 ; 65.138,33.39 65.383,33.5 65.575,33.587 ccw(c65.391,33.997) 65.577,33.588 65.768,33.674 ; 65.769,33.674 65.957,33.759 ccw(c65.855,33.988) 65.959,33.76 66.006,33.782 ; 66.007,33.782 66.053,33.803 66.102,33.825 66.323,33.926 66.403,33.962 66.531,34.02 66.691,34.093 66.801,34.143 ccw(c66.615,34.553) 66.803,34.144 66.848,34.164 ; 66.849,34.164 66.893,34.185 ccw(c66.625,34.777) 66.896,34.186 67.078,34.269 67.169,34.311 ; 67.169,34.311 ccw(c66.984,34.721) 67.172,34.312 67.275,34.36 67.399,34.417 ; 67.4,34.417 67.491,34.459 ccw(c67.387,34.686) 67.494,34.46 67.574,34.497 67.719,34.564 ; 67.719,34.564 67.838,34.618 67.903,34.649 68.051,34.717 68.154,34.765 68.22,34.796 ; 68.22,34.796 ccw(c68.117,35.024) 68.222,34.797 68.267,34.818 ccw(c68.077,35.226) 68.268,34.818 68.312,34.839 ; 68.313,34.839 68.357,34.86 68.451,34.904 68.539,34.945 ccw(c68.435,35.172) 68.541,34.946 68.631,34.988 ccw(c68.44,35.396) 68.632,34.989 68.721,35.03 ccw(c68.617,35.258) 68.723,35.031 68.814,35.074 68.904,35.117 ; 68.905,35.117 ccw(c68.713,35.524) 68.906,35.118 68.996,35.16 69.089,35.204 69.18,35.247 69.27,35.289 ccw(c68.918,36.036) 69.273,35.291 69.41,35.356 69.547,35.422 ccw(c69.441,35.648) 69.549,35.423 69.686,35.488 ccw(c69.406,36.075) 69.688,35.489 69.872,35.578 ccw(c69.678,35.984) 69.874,35.579 70.105,35.69 ccw(c69.823,36.276) 70.108,35.692 70.72,35.99 ccw(c70.359,36.732) 70.725,35.992 71.205,36.229 ; 71.206,36.23 71.45,36.351 ccw(c71.162,36.934) 71.453,36.353 71.648,36.45 ccw(c71.281,37.189) 71.652,36.452 71.853,36.553 72.001,36.628 ; 72.002,36.628 72.154,36.705 72.309,36.784 ; 72.31,36.784 72.469,36.865 72.568,36.916 ; 72.569,36.916 72.674,36.97 72.777,37.023 ccw(c72.665,37.246) 72.779,37.024 72.886,37.079 72.886,37.082 72.927,37.123 73.976,37.673 ; 74.007,37.689 75.096,38.26 ; 75.098,38.261 ccw(c72.298,43.258) 75.201,38.321 75.951,38.761 76.111,38.761 76.584,39.234 76.584,39.652 v1(77.064,40.132) ; J1.P2_2@75.711,45.947 75.723,45.935 76.213,45.935 v1(76.225,45.923) 76.237,45.935 76.779,45.935 J1.P2_1@76.791,45.947 ; 83.357,53.36 83.718,52.999 v1(83.718,49.017)
  Bottom Layer w0.2: v1(4.547,29.312) 4.547,29.261 4.364,29.079 ccw(c4.538,28.905) 4.303,28.976 4.303,28.934 4.303,28.885 4.406,28.689 5.339,26.903 5.375,26.855 v1(6.065,26.164) ; v1(76.225,45.923) 76.225,45.974 76.352,46.101 81.938,46.101 83.718,47.881 v1(83.718,49.017) ; v1(83.083,54.102) v1@83.151,54.102 ; v1@83.569,54.363 v1(83.617,54.411) ; v1@83.617,54.381 v1@83.631,54.396 ; J2.P1_2@83.68,54.087 J2.P1_2@83.705,54.112 ; v1@84.153,54.334 v1(84.201,54.381) v1@84.186,54.396 ; v1@84.201,54.297 v1@84.238,54.334 ; J2.P1_1@84.595,54.112 84.735,54.112 J2.P1_1@84.76,54.087
  other v1: 83.617,41.656 82.398,42.164 84.15,43.155 83.134,43.688 80.315,44.628 77.648,44.907 77.699,45.491 78.359,45.796
I2C3_SCL_1V8: J1.1 J2.3 J3.3 | length 108.9
  Top Layer w0.1: v1(2.388,31.115) 2.348,31.076 2.348,30.727 2.19,30.568 2.19,30.468 2.335,30.195 2.395,30.135 2.427,30.114 2.605,30.114 J3.3@2.813,30.18 ; v1(5.766,25.629) 6.426,24.968 7.275,24.968 7.304,24.972 10.176,25.832 10.922,25.832 10.951,25.803 19.253,17.501 20.084,17.501 20.168,17.584 20.276,17.666 cw(c25.788,10.193) 20.444,17.786 cw(c25.75,10.247) 21.103,18.209 ; 21.033,18.169 21.103,18.21 ; 22.419,18.871 22.495,18.904 22.571,18.936 22.648,18.968 22.71,18.993 22.773,19.018 22.836,19.043 22.9,19.067 22.965,19.091 23.03,19.115 23.096,19.139 23.162,19.163 23.229,19.186 23.296,19.209 23.364,19.232 23.433,19.255 ; 22.456,18.888 22.38,18.856 22.305,18.823 22.23,18.791 22.157,18.757 22.084,18.724 21.997,18.684 21.912,18.643 21.828,18.601 21.731,18.552 21.636,18.503 21.529,18.446 21.411,18.381 21.292,18.315 21.174,18.25 21.103,18.21 ; 23.398,19.244 23.433,19.255 ; 23.503,19.277 23.573,19.299 23.643,19.321 23.713,19.343 23.783,19.365 23.853,19.388 25.986,19.596 25.989,19.596 27.724,19.844 ccw(c27.689,20.092) 27.728,19.845 27.938,19.878 32.299,20.571 ccw(c32.228,21.015) 32.309,20.572 32.504,20.608 32.818,20.666 32.956,20.692 33.095,20.718 33.233,20.744 33.417,20.78 33.602,20.816 33.877,20.871 ccw(c33.828,21.116) 33.879,20.872 35.092,21.128 35.328,21.18 ccw(c35.274,21.424) 35.33,21.181 35.52,21.223 35.663,21.256 ; 23.818,19.377 23.748,19.354 23.678,19.332 23.608,19.31 23.538,19.288 23.468,19.266 23.433,19.255 ; 35.664,21.256 35.74,21.274 35.808,21.289 35.954,21.323 36.1,21.357 36.248,21.392 36.346,21.415 36.445,21.439 36.545,21.463 36.646,21.487 36.745,21.511 36.846,21.536 36.947,21.561 36.998,21.573 37.406,21.675 37.864,21.791 38.323,21.91 38.781,22.031 39.24,22.155 ; 39.24,22.155 39.749,22.295 40.258,22.438 40.818,22.599 40.997,22.651 41.378,22.763 41.987,22.946 42.596,23.132 ccw(c42.522,23.371) 42.597,23.133 43.255,23.339 ccw(c43.119,23.768) 43.256,23.34 43.962,23.566 ccw(c43.886,23.804) 43.964,23.567 44.771,23.832 45.499,24.079 ; 45.5,24.08 45.675,24.139 ccw(c45.594,24.375) 45.676,24.139 46.726,24.506 ccw(c46.577,24.931) 46.731,24.507 48.071,24.993 ccw(c47.986,25.228) 48.075,24.995 ccw(c47.988,25.229) 48.077,24.995 48.623,25.202 49.608,25.574 51.026,26.132 51.703,26.405 ; 51.704,26.405 52.188,26.603 52.62,26.781 ; 52.62,26.781 53.005,26.941 53.341,27.083 53.564,27.177 53.629,27.204 53.916,27.327 54.203,27.449 54.443,27.553 54.682,27.656 54.922,27.76 ; 54.922,27.76 55.161,27.865 55.401,27.97 55.592,28.054 55.785,28.139 55.976,28.224 56.167,28.309 56.359,28.395 56.553,28.482 56.744,28.568 56.891,28.634 ; 56.892,28.635 56.935,28.654 ; 56.935,28.654 cw(c57.019,28.472) 56.937,28.655 57.08,28.72 57.157,28.755 57.225,28.785 57.369,28.851 57.514,28.917 ; 57.514,28.917 57.659,28.983 57.804,29.05 57.949,29.117 58.094,29.183 58.239,29.251 58.385,29.318 58.53,29.385 58.676,29.453 58.822,29.521 58.968,29.589 59.115,29.658 59.261,29.726 59.408,29.795 59.555,29.864 59.704,29.935 59.733,29.949 59.849,30.003 ; 59.85,30.004 59.997,30.073 60.144,30.143 60.243,30.19 60.342,30.237 ; 60.343,30.238 60.441,30.284 60.539,30.331 60.639,30.379 60.738,30.426 60.837,30.474 60.936,30.521 61.036,30.569 61.136,30.617 61.235,30.665 61.335,30.713 61.435,30.761 ccw(c61.327,30.986) 61.437,30.762 61.535,30.81 61.636,30.858 61.736,30.907 61.814,30.944 61.952,31.012 63.403,31.719 63.493,31.763 63.583,31.807 63.673,31.852 63.762,31.896 63.896,31.962 64.033,32.03 64.721,32.371 64.85,32.436 64.978,32.5 65.106,32.564 65.232,32.627 65.401,32.712 65.611,32.819 66.66,33.354 66.828,33.44 66.955,33.505 67.082,33.571 67.209,33.637 67.337,33.703 67.422,33.747 67.508,33.792 67.594,33.836 67.68,33.881 ; 67.68,33.881 67.815,33.952 68.379,34.247 68.449,34.284 68.47,34.295 68.572,34.348 68.648,34.389 68.783,34.46 68.874,34.508 68.966,34.556 69.06,34.606 69.149,34.653 69.243,34.703 69.418,34.796 73.976,37.266 73.978,37.267 74.549,37.551 ; 74.55,37.552 74.977,37.751 75.797,38.144 ccw(c75.71,38.324) 75.807,38.149 75.9,38.201 ; 75.901,38.201 ccw(c75.804,38.376) 75.902,38.202 ccw(c75.804,38.376) 75.904,38.203 75.926,38.215 75.927,38.216 75.948,38.228 75.959,38.235 ccw(c75.808,38.494) 75.96,38.235 ccw(c75.808,38.494) 75.962,38.236 ; 75.962,38.236 75.982,38.248 75.984,38.249 75.993,38.255 76.002,38.26 ccw(c75.902,38.433) 76.005,38.262 76.011,38.266 76.016,38.268 76.038,38.282 ; 76.039,38.282 76.04,38.283 76.049,38.288 76.059,38.295 ccw(c75.902,38.551) 76.061,38.296 76.063,38.297 76.071,38.302 76.088,38.313 76.093,38.316 76.106,38.324 76.107,38.325 ccw(c76,38.494) 76.109,38.326 76.12,38.333 76.137,38.344 76.153,38.354 76.168,38.364 76.179,38.372 76.192,38.38 76.194,38.381 ; 76.194,38.382 76.208,38.391 ; 76.208,38.391 76.224,38.402 76.226,38.403 ; 76.227,38.404 76.244,38.415 ; 76.244,38.416 76.261,38.428 ; 76.262,38.428 76.283,38.443 76.287,38.446 76.29,38.448 76.302,38.457 ccw(c76.186,38.62) 76.305,38.459 76.316,38.467 76.324,38.473 76.335,38.481 76.349,38.491 76.368,38.506 76.376,38.512 ; 76.377,38.512 76.401,38.531 76.409,38.538 ccw(c76.225,38.774) 76.411,38.539 76.44,38.562 76.455,38.574 ; 76.456,38.575 ccw(c74.283,41.255) 76.679,38.772 76.71,38.802 ccw(c76.57,38.945) 76.712,38.804 76.74,38.832 ccw(c76.598,38.974) 76.753,38.846 ; 76.736,38.83 76.76,38.855 76.78,38.877 76.801,38.9 76.821,38.922 76.838,38.941 76.855,38.961 76.872,38.98 ; J1.1@76.791,41.712 76.826,41.748 78.197,41.748 v1(78.232,41.783) ; 76.919,39.036 76.913,39.03 ; v1@78.232,41.748 78.232,41.351 77.523,40.642 77.523,39.988 77.511,39.966 77.504,39.952 76.934,39.053 76.913,39.03 ; v1(84.194,47.404) 84.194,47.433 84.399,47.638 84.399,51.207 84.709,51.516 84.709,52.451 v1(85.522,53.264) ; 76.872,38.98 76.913,39.03 ; 76.872,38.98 76.889,39 76.905,39.02 76.913,39.03
  Bottom Layer w0.1: v1(2.388,31.115) 2.388,31.072 2.571,30.888 2.664,30.845 2.68,30.838 2.703,30.815 4.939,26.597 4.94,26.595 5.186,26.179 5.211,26.153 5.232,26.146 5.576,26.025 v1(5.766,25.629) ; v1(78.232,41.783) 79.35,41.783 84.238,46.671 84.238,47.361 v1(84.194,47.404) ; J2.3@84.76,53.352 85.339,53.352 85.427,53.264 v1(85.522,53.264)